# EAGLE board Sync-Combiner-Plug-n-Play (EAGLE 9.6.2)
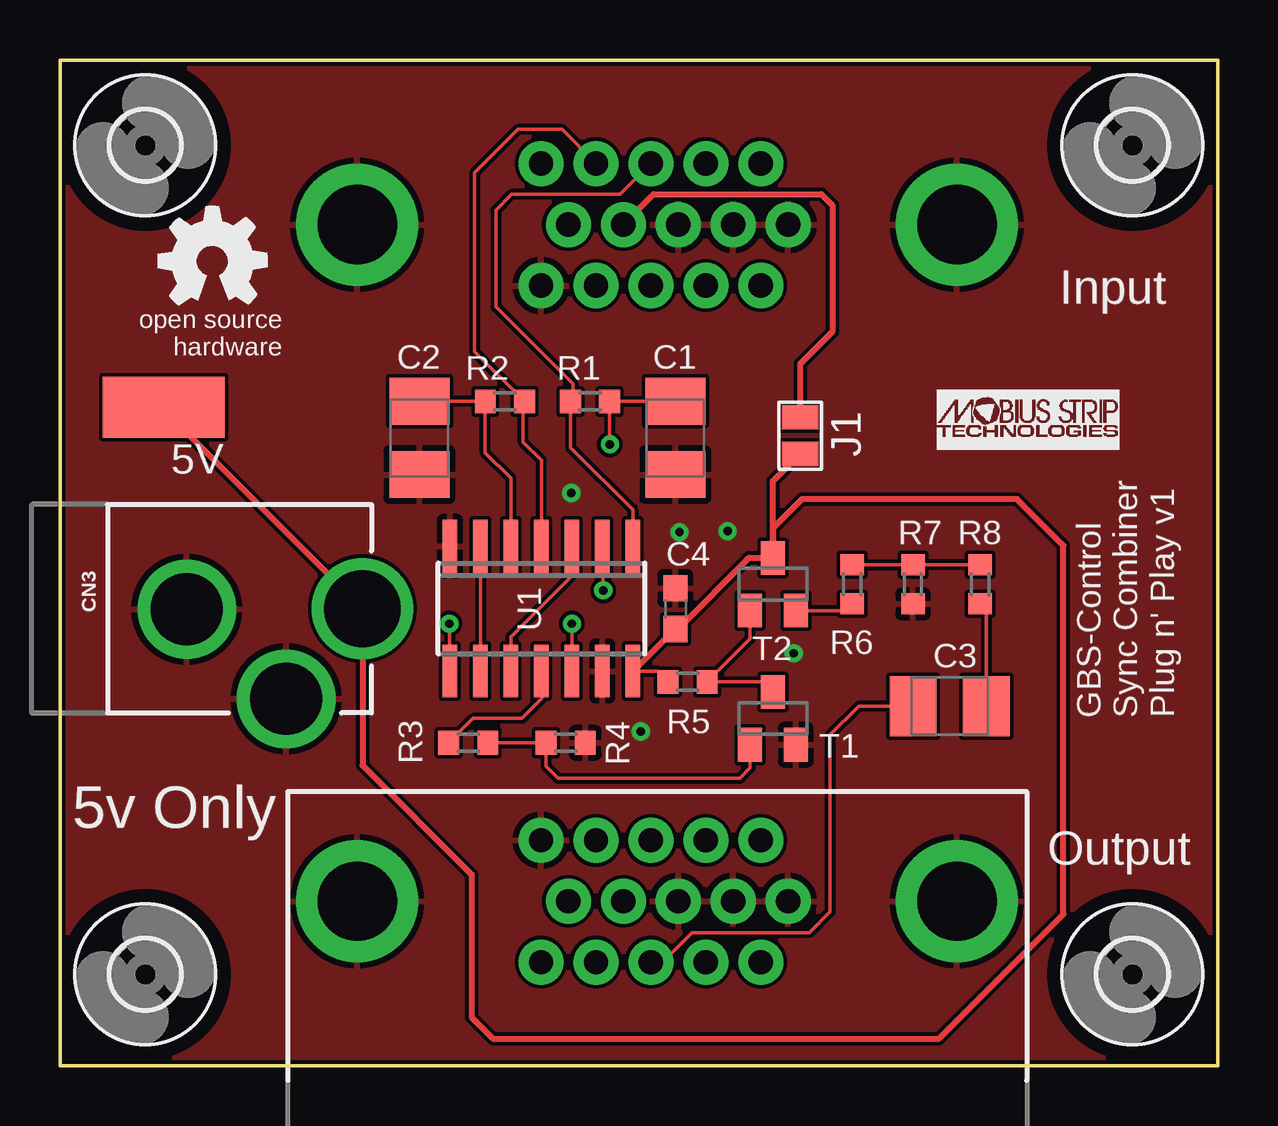
[diagram p0: board, top side]
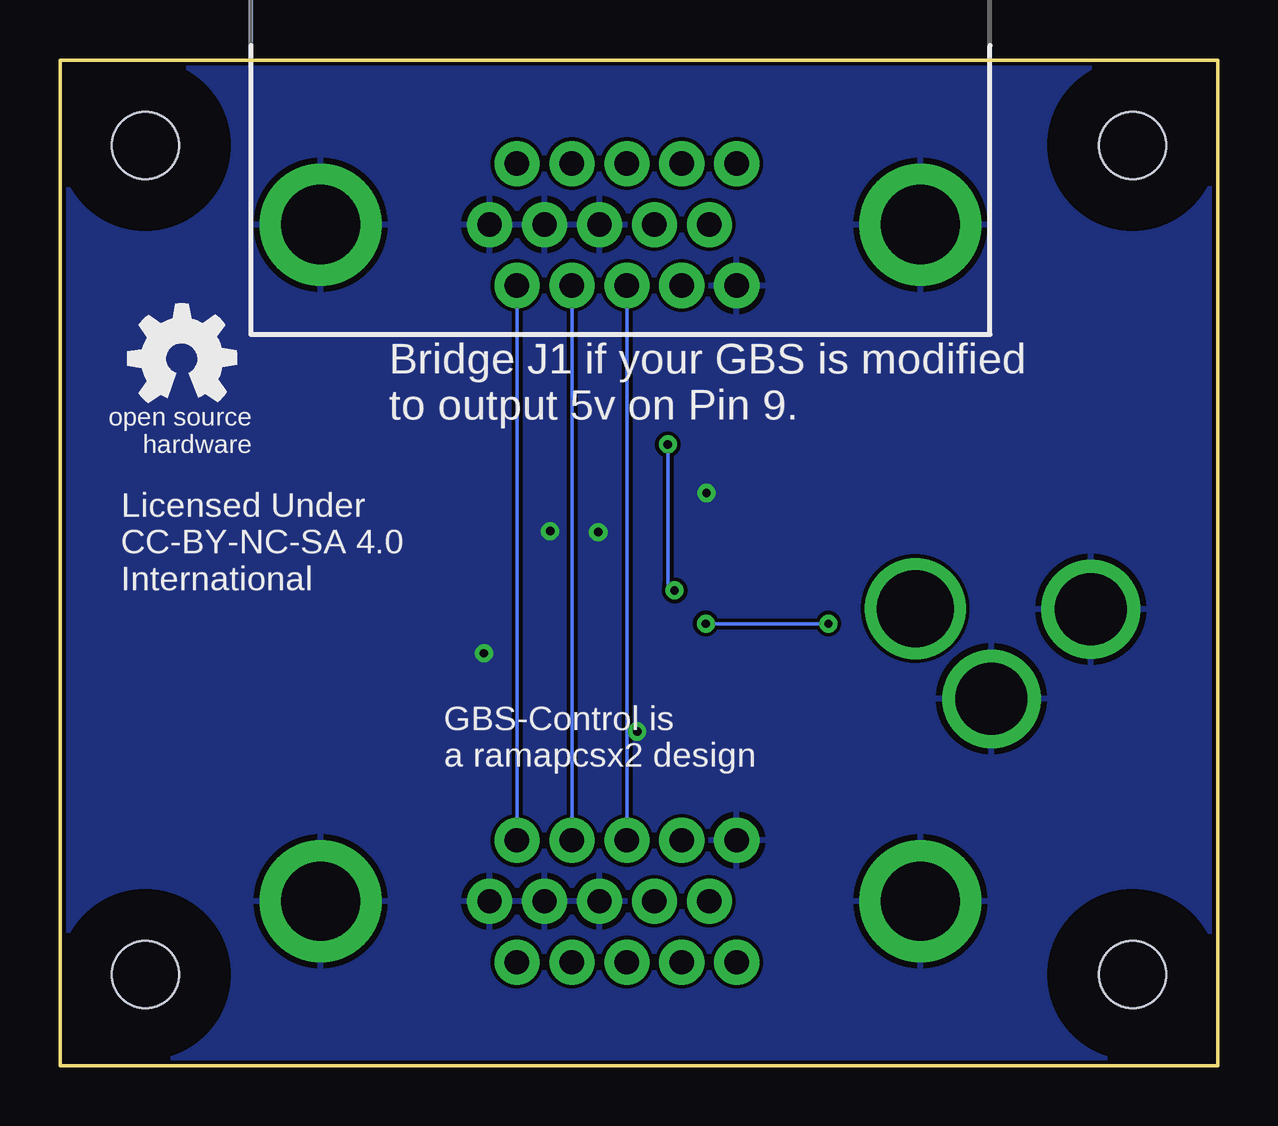
[diagram p1: board, bottom side, seen from below]

Size 48.26 x 41.91 mm. Coordinates in mm from the lower left corner, seen from the top.
Outline: 0,0 0,41.91 48.26,41.91 48.26,0 0,0
Copper layers (1*16): Top 0.035mm / dielectric 1.5mm / Bottom 0.035mm
Design rules "default *": minimum track width 6mil, minimum drill 0.35mm, track to track 6mil, track to pad 6mil, pad to pad 6mil, via to via 6mil, smd to smd 6mil, copper to edge 6mil, drill to drill 6mil, minimum pad ring 10mil, minimum via ring 8mil, stop-mask expansion 4mil, vias tented up to drill 20mil, thermal gap 10mil

## Footprints (pad centres in the part's own frame; a part is rotated, then mirrored left to right if it is on the bottom)
SMD2,54-5,08 = smd 2.54 x 5.08: 1 0,0
B/3528-21R = smd 1.95 x 2.5: + 1.525,0; - -1.525,0
C0603 = smd 1.1 x 1: 1 -0.85,0; 2 0.85,0
DB15 = drill 1.016 pad 1.88: 1 -4.32,-7.62; 2 -2.03,-7.62; 3 0.26,-7.62; 4 2.55,-7.62; 5 4.84,-7.62; 6 -5.46,-5.08; 7 -3.17,-5.08; 8 -0.88,-5.08; 9 1.41,-5.08; 10 3.7,-5.08; 11 -4.32,-2.54; 12 -2.03,-2.54; 13 0.26,-2.54; 14 2.55,-2.54; 15 4.84,-2.54 | drill 3.302 pad 5.08: G1 -12.5,-5.08; G2 12.5,-5.08
POWER_JACK_PTH_LOCK = drill 2.997 pad 4.115: GND 0.025,6.557; GNDBREAK 3.762,10.7 | drill 3.2 pad 4.115: PWR 0,13.878
2,8 = hole 2.8: 0,0
JUMP-2 = smd 1.016 x 1.524: 1 -0.762,0; 2 0.762,0
R0603 = smd 0.87 x 0.98: 1 -0.815,0; 2 0.815,0
SOT23 = smd 1 x 1.4: 1 -0.95,-1.1; 2 0.95,-1.1; 3 0,1.1
SO14 = smd 0.6 x 2.2: 1 -3.81,-2.6; 2 -2.54,-2.6; 3 -1.27,-2.6; 4 0,-2.6; 5 1.27,-2.6; 6 2.54,-2.6; 7 3.81,-2.6; 8 3.81,2.6; 9 2.54,2.6; 10 1.27,2.6; 11 0,2.6; 12 -1.27,2.6; 13 -2.54,2.6; 14 -3.81,2.6

## Placement (x,y rotation side)
5V  [SMD2,54-5,08]  4.32,27.43 90 top
C1  22uf  [B/3528-21R]  25.65,26.16 90 top
C2  22uf  [B/3528-21R]  14.99,26.16 90 top
C3  220uf  [B/3528-21R]  37.08,14.99 0 top
C4  0.1uf  [C0603]  25.65,19.05 270 top
CN1  [DB15]  24.89,40.13 0 bottom
CN2  [DB15]  24.89,1.78 180 top
CN3  [POWER_JACK_PTH_LOCK]  -1.27,19.05 270 top
E$1  [TEST]  36.28,25.26 0 top
E$2  [OSHW_5MM]  6.35,33.53 0 top
E$3  [2,8]  44.7,3.81 0 top
E$4  [OSHW_5MM]  43.18,29.46 0 bottom
E$5  [2,8]  3.56,3.81 0 top
E$6  [2,8]  3.56,38.35 0 top
E$7  [2,8]  44.7,38.35 0 top
J1  [JUMP-2]  30.85,26.26 90 top
R1  2.2k  [R0603]  22.1,27.69 180 top
R2  2.2k  [R0603]  18.54,27.69 0 top
R3  1.8k  [R0603]  17.02,13.46 0 top
R4  1.8k  [R0603]  21.08,13.46 180 top
R5  2.7k  [R0603]  26.16,16 0 top
R6  150  [R0603]  33.02,20.07 270 top
R7  47  [R0603]  35.56,20.07 270 top
R8  75  [R0603]  38.35,20.07 90 top
T1  mmbt3904  [SOT23]  29.72,14.48 0 top
T2  mmbt3904  [SOT23]  29.72,20.07 0 top
U1  sn74ls86a  [SO14]  20.07,19.05 180 top

## Library data of the parts
5V = wirepad
C1-C3 = ref-packages-longpad
C4 T1 T2 = adafruit
CN1 CN2 = SparkFun-Retired
CN3 = SparkFun-Connectors-Modified
E$1 E$2 E$4 = oshw
E$3 E$5-E$7 = holes
J1 = smd-special
R1-R8 = smd-ipc
U1 = analog-devices

## Nets
5V: 5V.1 C4.2 CN3.PWR J1.1 R5.1 T2.3 U1.14
BLUE: CN1.3 CN2.3
CSYNC: C3.- CN2.13
GND: C1.- C2.- C4.1 CN1.5 CN1.6 CN1.7 CN1.8 CN1.G1 CN1.G2 CN2.5 CN2.6 CN2.7 CN2.8 CN2.G1 CN2.G2 CN3.GND CN3.GNDBREAK R4.1 R7.2 T1.2 U1.7 U1.13
GREEN: CN1.2 CN2.2
HSYNC: CN1.13 R1.2 U1.1
RED: CN1.1 CN2.1
S$1: C2.+ R2.1 U1.5
S$2: U1.8 U1.12
S$3: C1.+ R1.1 U1.2
S$4: CN1.9 J1.2
S$5: U1.3 U1.10
S$6: U1.6 U1.9
S$7: R3.2 R4.2 T1.1
S$8: R3.1 U1.11
S$9: R5.2 T1.3 T2.1
S$10: R6.2 T2.2
S$11: R6.1 R7.1 R8.2
S$12: C3.+ R8.1
VSYNC: CN1.14 R2.2 U1.4

## Tracks (layer width: path | path; a pad name or v marks a point on that pad's centre or on a via)
5V
  Top 0.152: U1.14 24.9,16.45 R5.1 | 28.62,21.17 28.74,21.17 | T2.3 29.68,21.17
  Top 0.254: U1.14 25.63,18.2 C4.2 25.76,18.2 28.72,21.17 28.74,21.17 29.68,21.17 | T2.3 | T2.3 29.72,24.35 | 29.72,22.4 T2.3 | 29.72,22.4 30.93,23.61 39.89,23.61 41.83,21.67 41.83,6.32 36.64,1.13 18.05,1.13 17.16,2.02 17.16,7.96 12.61,12.52 CN3.PWR 4.32,27.34 5V.1 | 29.72,22.4 29.72,24.36 J1.1
BLUE
  Bottom 0.152: CN1.3 CN2.3
CSYNC
  Top 0.152: C3.- 33.3,14.99 32.1,13.79 32.1,6.42 31.24,5.55 26.34,5.55 25.11,4.32 CN2.13
GND  (via drill 0.35)
  other vias: 27.83,22.28 30.59,17.19 21.31,23.87 24.21,13.93 25.82,22.24
  pour Top: -1.27,42.48 -1.27,-1.57 49.53,-1.57 49.53,42.48
  pour Bottom: -1.27,42.48 -1.27,-1.57 49.53,-1.57 49.53,42.48
GREEN
  Bottom 0.152: CN1.2 CN2.2
HSYNC
  Top 0.152: U1.1 23.88,23.16 21.28,25.75 R1.2 21.38,27.79 21.38,28.41 18.17,31.63 18.17,35.65 18.82,36.31 23.35,36.31 CN1.13
RED
  Bottom 0.152: CN1.1 CN2.1
S$1
  Top 0.152: C2.+ R2.1 17.73,25.55 18.8,24.48 U1.5
S$2  (via drill 0.35)
  Top 0.152: U1.12 v21.34,18.42 | v16.23,18.42 16.23,16.48 U1.8
  Bottom 0.152: v21.34,18.42 v16.23,18.42
S$3  (via drill 0.35)
  Top 0.152: C1.+ R1.1 v22.91,25.9 v22.92,25.89 | v22.64,19.81 22.64,21.61 U1.2
  Bottom 0.152: v22.92,25.89 22.92,20.09 v22.64,19.81
S$4
  Top 0.254: J1.2 30.86,29.24 32.19,30.58 32.19,35.86 31.73,36.32 24.75,36.32 CN1.9
S$5
  Top 0.152: U1.3 21.34,20.42 18.8,17.88 U1.10
S$6
  Top 0.152: U1.6 U1.9
S$7
  Top 0.152: R3.2 R4.2 20.27,12.48 20.76,11.98 28.33,11.98 28.77,12.42 T1.1
S$8
  Top 0.152: R3.1 17.22,14.48 19.25,14.48 20.07,15.29 U1.11
S$9
  Top 0.152: T1.3 29.29,16 R5.2 28.77,17.79 T2.1
S$10
  Top 0.152: R6.2 32.73,18.97 T2.2
S$11
  Top 0.152: R6.1 R7.1 R8.2
S$12
  Top 0.152: R8.1 38.61,19 C3.+
VSYNC
  Top 0.152: U1.4 20.07,25.23 19.31,25.98 19.31,27.64 R2.2 17.28,29.76 17.28,37.2 19.1,39.02 20.92,39.02 CN1.14

## Text on the board
tNames: Input | GBS-Control / Sync Combiner / Plug n' Play v1 | 5v Only | Output
bNames: Bridge J1 if your GBS is modified / to output 5v on Pin 9. | Licensed Under / CC-BY-NC-SA 4.0 / International | GBS-Control is / a ramapcsx2 design